# EAGLE board untitled (EAGLE 6.4)
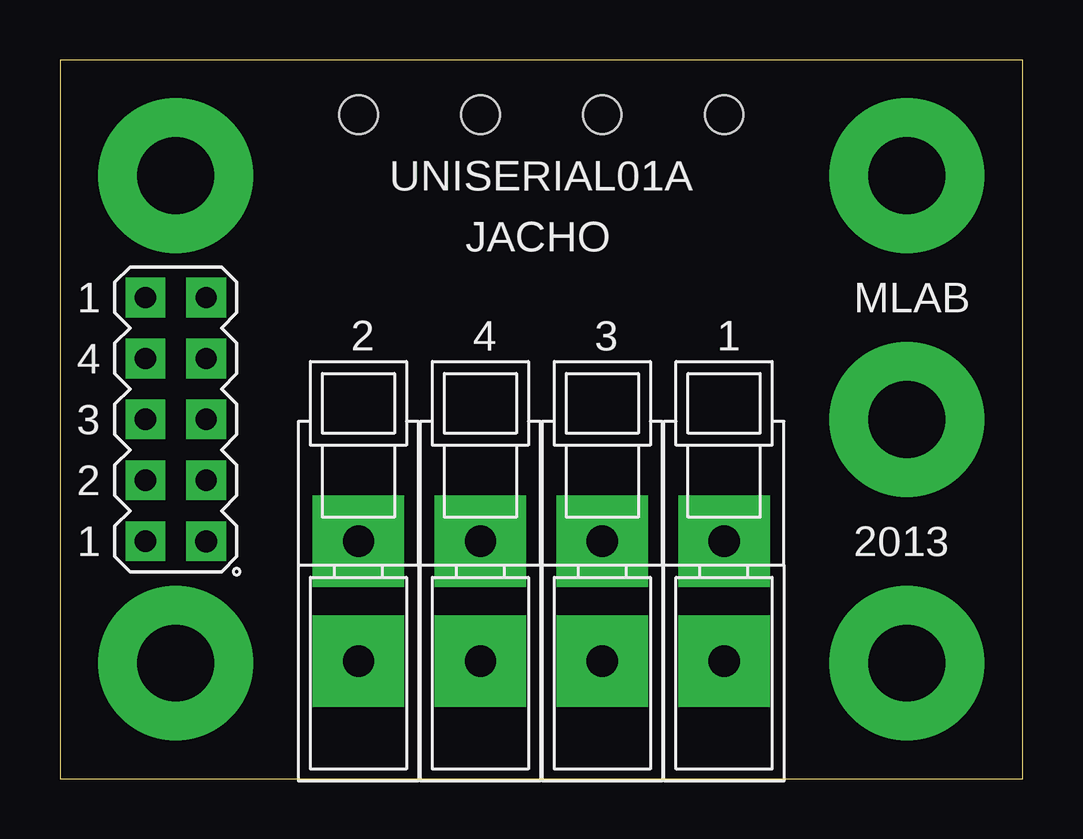
[diagram p0: board, top side]
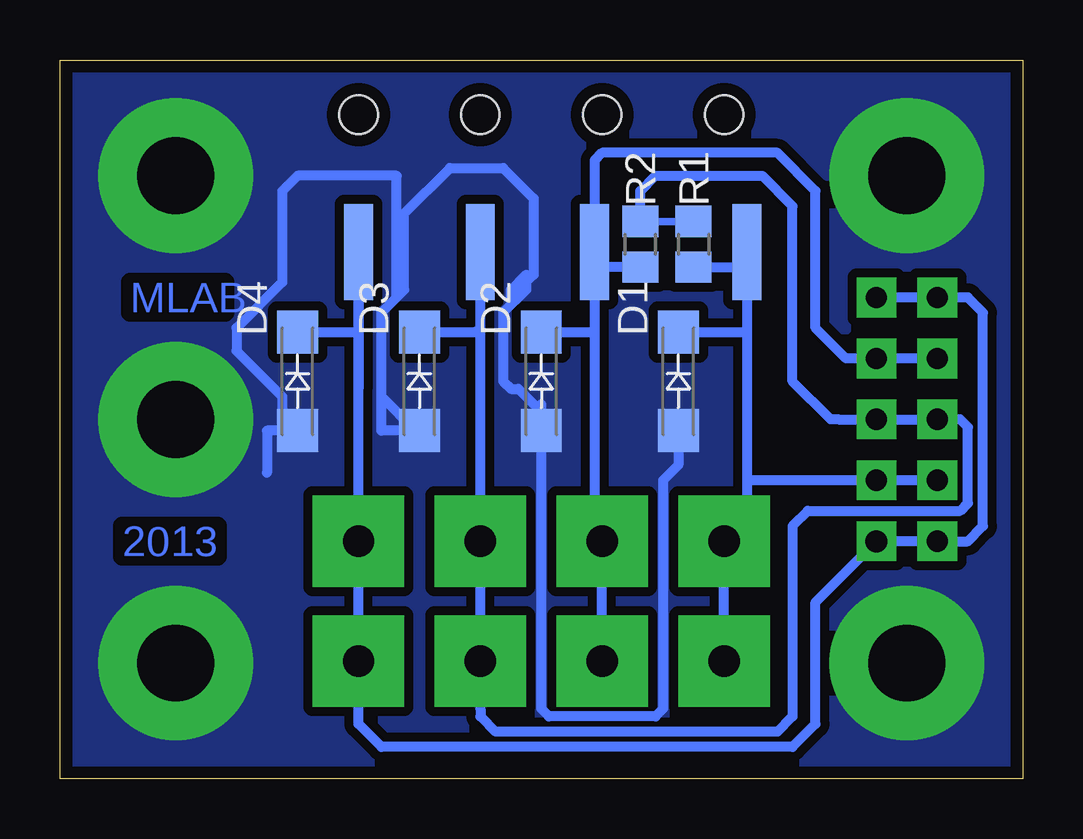
[diagram p1: board, bottom side, seen from below]

Size 40.13 x 29.97 mm. Coordinates in mm from the lower left corner, seen from the top.
Outline: 0,0 40.13,0 40.13,29.97 0,29.97 0,0
Copper layers (1*16): Top 0.035mm / dielectric 1.5mm / Bottom 0.035mm
Design rules "jacho *": minimum track width 8mil, minimum drill 16mil, track to track 15mil, track to pad 15mil, pad to pad 6mil, via to via 6mil, smd to smd 6mil, copper to edge 20mil, drill to drill 8mil, minimum pad ring 10mil, minimum via ring 8mil, stop-mask expansion 4mil, vias tented up to drill 25mil, thermal gap 0mil
Holes 1.6 mm at 22.61,27.69 12.45,27.69 17.53,27.69 27.69,27.69

## Footprints (pad centres in the part's own frame; a part is rotated, then mirrored left to right if it is on the bottom)
SMA = smd 1.8 x 1.7: A -2.05,0; K 2.05,0
0805 = smd 1.3 x 1.5: 1 -0.95,0; 2 0.95,0
WAGO256 = drill 1.3 pad 3.81 square: 1 2.54,0; A1 -2.46,0
SMD_MA01-1 = smd 4 x 1.2: 1 0,0
MA05-2 = drill 0.914 pad 1.651 square: 1 -5.08,-1.27 | drill 0.889 pad 1.651 square: 2 -5.08,1.27; 3 -2.54,-1.27; 4 -2.54,1.27; 5 0,-1.27; 6 0,1.27; 7 2.54,-1.27; 8 2.54,1.27; 9 5.08,-1.27; 10 5.08,1.27
SROUB3M = drill 3.2 pad 6.452: P$1 0,0

## Placement (x,y rotation side)
D1  [SMA]  14.35,16.57 90 bottom
D2  [SMA]  20.07,16.57 90 bottom
D3  [SMA]  25.15,16.57 90 bottom
D4  [SMA]  30.23,16.57 90 bottom
R1  10k  [0805]  13.72,22.29 90 bottom
R2  10k  [0805]  15.94,22.29 90 bottom
SV1  [WAGO256]  12.45,7.37 90 top
SV2  [WAGO256]  17.53,7.37 90 top
SV3  [WAGO256]  22.61,7.37 90 top
SV4  [WAGO256]  27.69,7.37 90 top
SV5  [SMD_MA01-1]  11.49,21.97 90 bottom
SV6  [SMD_MA01-1]  17.84,21.97 90 bottom
SV7  [SMD_MA01-1]  22.61,21.97 90 bottom
SV8  [SMD_MA01-1]  27.69,21.97 90 bottom
SV9  [MA05-2]  4.83,14.99 90 top
X1  SROUB3M  [SROUB3M]  4.83,4.83 0 top
X2  SROUB3M  [SROUB3M]  4.83,25.15 0 top
X3  SROUB3M  [SROUB3M]  35.31,4.83 0 top
X4  SROUB3M  [SROUB3M]  35.31,25.15 0 top
X5  SROUB3M  [SROUB3M]  35.31,14.99 0 top

## Library data of the parts
D1-D4 = moje_diody
R1 R2 = moje_R
SV1-SV4 = moje_konektory
SV5-SV8 = moje_hrebinky
SV9 = moje_hrebinky; OC_FARNELL: unknown; OC_NEWARK: unknown
X1-X5 = moje

## Nets
+VCC: D3.K R1.2 R2.2 SV3.1 SV3.A1 SV7.1 SV9.5 SV9.6
GND: D1.A D2.A D3.A D4.A X1.P$1 X2.P$1 X3.P$1 X4.P$1 X5.P$1
N$2: D1.K R1.1 SV1.1 SV1.A1 SV5.1 SV9.3 SV9.4
N$3: D2.K R2.1 SV2.1 SV2.A1 SV6.1 SV9.7 SV9.8
N$5: D4.K SV4.1 SV4.A1 SV8.1 SV9.1 SV9.2 SV9.9 SV9.10

## Tracks (layer width: path | path; a pad name or v marks a point on that pad's centre or on a via)
+VCC
  Bottom 0.305: R1.2 R2.2
  Bottom 0.406: 22.61,18.8 SV3.1 22.61,7.37 | 22.61,18.8 SV7.1 | SV3.A1 22.61,7.37 | SV3.A1 22.61,7.37 | R2.2 15.94,24.51 15.3,25.15 10.86,25.15 9.59,23.88 9.59,16.57 8,14.99 7.68,14.99 SV9.5 SV9.6 2.6,14.99 2.29,14.67 2.29,11.49 2.6,11.18 8.95,11.18 9.59,10.54 9.59,7.68 9.59,2.6 10.22,1.97 21.97,1.97 22.61,2.6 22.61,2.92 SV3.A1 | D3.K 22.78,18.62 22.61,18.8
GND
  Bottom 0.406: D1.A 14.35,13.08 14.99,12.45 14.99,2.92 15.3,2.6 19.75,2.6 20.07,2.92 D2.A 20.07,15.3 | D4.A 30.23,14.67 | 20.07,15.3 20.07,15.62 | D4.A 31.5,14.52 31.5,12.76 | 26.73,15.94 26.73,14.67 26.73,14.52 D3.A 25.32,14.52 26.73,15.94 | 26.73,15.94 26.73,19.43 | 26.73,19.43 26.1,20.07 26.1,25.15 30.23,25.15 30.86,24.51 30.86,20.7 32.77,18.8 32.77,17.84 30.86,15.94 30.86,15.16 D4.A | 26.73,15.94 26.73,19.43 | 26.73,19.43 25.78,20.38 25.78,23.56 23.88,25.46 21.65,25.46 20.38,24.19 20.38,21.02 21.34,20.07 21.34,20.38 20.7,21.02 20.7,20.38 21.65,19.43 21.65,16.57 21.34,16.26 21.02,16.26 20.07,15.3
  pour Bottom: -1.52,30.23 -1.52,-1.52 44.2,-1.52 44.2,31.5 -1.52,31.5
N$2
  Bottom 0.406: SV5.1 11.49,21.34 | 11.49,21.34 11.49,18.48 | 11.49,18.48 11.49,12.45 | 11.49,12.45 11.49,10.86 SV1.1 SV1.A1 | D1.K 11.64,18.62 11.49,18.48 | SV9.4 SV9.3 11.49,12.45 | R1.1 11.5,21.34 11.49,21.34
N$3
  Bottom 0.406: 17.84,21.34 SV6.1 17.84,25.78 17.53,26.1 10.22,26.1 8.64,24.51 8.64,18.8 8.32,18.48 7.37,17.53 SV9.7 SV9.8 | 17.84,21.34 17.84,18.8 17.84,18.48 | 17.84,18.48 17.84,10.22 SV2.1 SV2.A1 | D2.K 17.99,18.62 17.84,18.48 | R2.1 17.84,21.34
N$5
  Bottom 0.406: 27.69,18.48 SV4.1 SV4.A1 27.69,2.29 26.73,1.33 9.59,1.33 8.64,2.29 8.64,7.37 SV9.1 SV9.2 2.29,9.91 1.65,10.54 1.65,19.43 2.29,20.07 SV9.10 SV9.9 | 27.69,18.48 SV8.1 | SV8.1 27.69,18.48 | 27.69,18.48 27.69,16.26 27.69,18.48 | 27.69,18.48 SV8.1 | D4.K 27.83,18.62 27.69,18.48

## Text on the board
Bottom: MLAB | 2013
tPlace: UNISERIAL01A | JACHO | 1 | MLAB | 2 | 4 | 3 | 1 | 4 | 3 | 2 | 1 | 2013